# EAGLE board MainBoard (EAGLE 8.5.0)
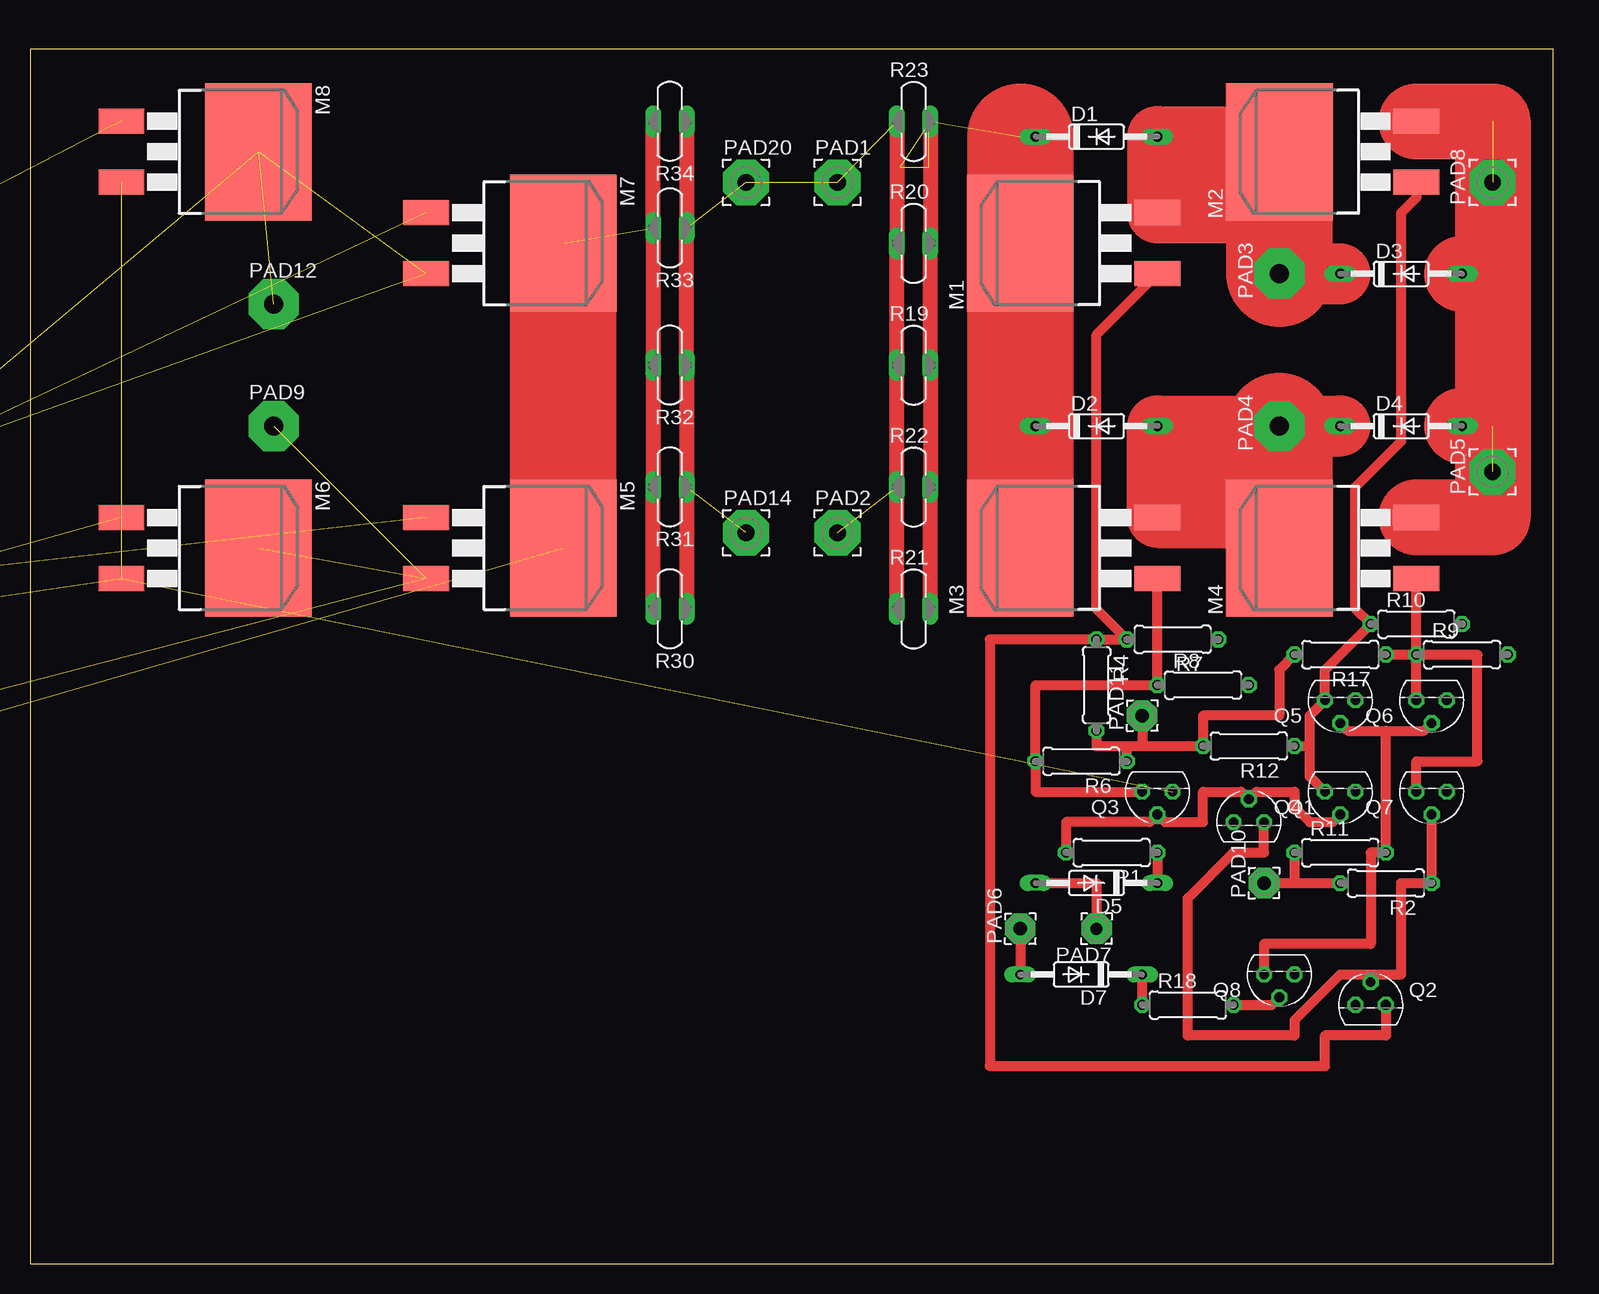
[diagram p0: board, top side]
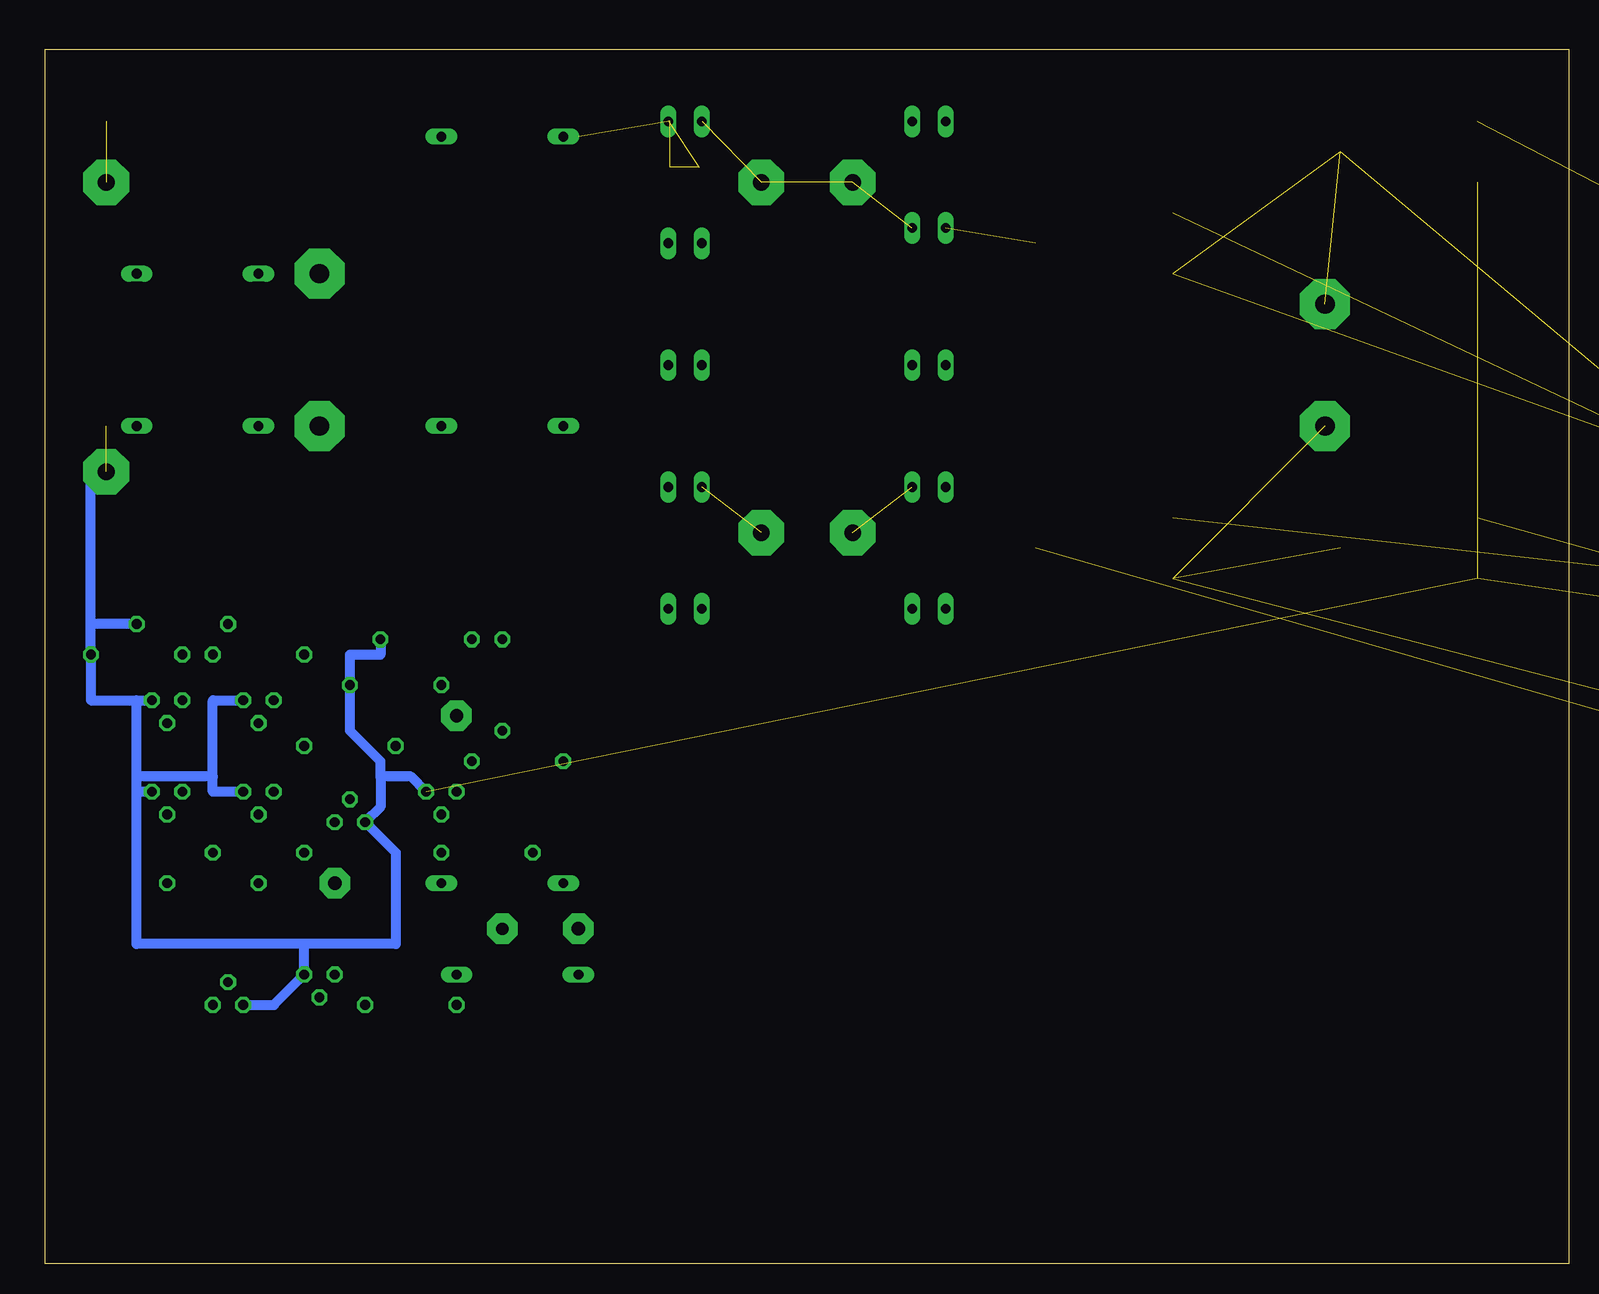
[diagram p1: board, bottom side, seen from below]

Size 126.98 x 101.27 mm. Coordinates in mm from the lower left corner, seen from the top.
Outline: 0,0 126.98,0 126.98,101.27 0,101.27 0,0
Copper layers (1*16): Top 0.035mm / dielectric 1.5mm / Bottom 0.035mm
Design rules "default": minimum track width 6mil, minimum drill 0.35mm, track to track 6mil, track to pad 6mil, pad to pad 6mil, via to via 6mil, smd to smd 6mil, copper to edge 40mil, drill to drill 6mil, minimum pad ring 10mil, minimum via ring 8mil, stop-mask expansion 4mil, vias tented up to drill 0mil, thermal gap 10mil

## Footprints (pad centres in the part's own frame; a part is rotated, then mirrored left to right if it is on the bottom)
DO35-10 = drill 0.813 long: A 5.08,0; C -5.08,0
D2PACK = smd 2.083 x 3.81: 1 -2.54,-8.89; 3 2.54,-8.89 | smd 11.43 x 8.89: 2 0,2.54
3,81/1,4 = drill 1.397 pad 3.81 octagon: 1 0,0
4,16O1,6 = drill 1.6 pad 4.166 octagon: 1 0,0
2,54/1,1 = drill 1.118 pad 2.54 octagon: 1 0,0
2,54/1,0 = drill 1.016 pad 2.54 octagon: 1 0,0
TO92 = drill 0.813 octagon: 1 1.27,0; 2 0,1.905; 3 -1.27,0
0207/7 = drill 0.813 octagon: 1 -3.81,0; 2 3.81,0
P660A = drill 0.813 long: 1 -1.397,0; 2 1.397,0

## Placement (x,y rotation side)
D1  1N4148DO35-10  [DO35-10]  88.9,93.98 0 top
D2  1N4148DO35-10  [DO35-10]  88.9,69.85 0 top
D3  1N4148DO35-10  [DO35-10]  114.3,82.55 0 top
D4  1N4148DO35-10  [DO35-10]  114.3,69.85 0 top
D5  1N4148DO35-10  [DO35-10]  88.9,31.75 180 top
D6  1N4148DO35-10  [DO35-10]  -88.9,26.67 0 top  (outside the outline)
D7  1N4148DO35-10  [DO35-10]  87.63,24.13 180 top
D8  1N4148DO35-10  [DO35-10]  -64.77,26.67 0 top  (outside the outline)
D9  1N4148DO35-10  [DO35-10]  -40.64,26.67 0 top  (outside the outline)
D10  1N4148DO35-10  [DO35-10]  -160.02,11.43 0 top  (outside the outline)
D11  1N4148DO35-10  [DO35-10]  -135.89,11.43 0 top  (outside the outline)
D12  1N4148DO35-10  [DO35-10]  -111.76,11.43 0 top  (outside the outline)
M1  IRFS7537PBF  [D2PACK]  85.09,85.09 90 top
M2  IRFS7537PBF  [D2PACK]  106.68,92.71 90 top
M3  IRFS7537PBF  [D2PACK]  85.09,59.69 90 top
M4  IRFS7537PBF  [D2PACK]  106.68,59.69 90 top
M5  IRFS7537PBF  [D2PACK]  41.91,59.69 270 top
M6  IRFS7537PBF  [D2PACK]  16.51,59.69 270 top
M7  IRFS7537PBF  [D2PACK]  41.91,85.09 270 top
M8  IRFS7537PBF  [D2PACK]  16.51,92.71 270 top
PAD1  [3,81/1,4]  67.31,90.17 0 top
PAD2  [3,81/1,4]  67.31,60.96 0 top
PAD3  WIREPAD4,16O1,6  [4,16O1,6]  104.14,82.55 90 top
PAD4  WIREPAD4,16O1,6  [4,16O1,6]  104.14,69.85 90 top
PAD5  [3,81/1,4]  121.92,66.04 90 top
PAD6  [2,54/1,1]  82.55,27.94 90 top
PAD7  [2,54/1,0]  88.9,27.94 180 top
PAD8  [3,81/1,4]  121.92,90.17 90 top
PAD9  WIREPAD4,16O1,6  [4,16O1,6]  20.32,69.85 0 top
PAD10  [2,54/1,1]  102.87,31.75 90 top
PAD11  [2,54/1,1]  92.71,45.72 90 top
PAD12  WIREPAD4,16O1,6  [4,16O1,6]  20.32,80.01 0 top
PAD13  [2,54/1,1]  -45.72,110.49 0 top  (outside the outline)
PAD14  [3,81/1,4]  59.69,60.96 0 top
PAD15  [2,54/1,0]  -160.02,72.39 0 top  (outside the outline)
PAD16  [2,54/1,1]  -134.62,72.39 0 top  (outside the outline)
PAD17  [2,54/1,1]  -109.22,72.39 0 top  (outside the outline)
PAD18  [3,81/1,4]  -153.67,104.14 0 top  (outside the outline)
PAD19  [3,81/1,4]  -115.57,104.14 0 top  (outside the outline)
PAD20  [3,81/1,4]  59.69,90.17 0 top
Q1  2N3904  [TO92]  101.6,36.83 0 top
Q2  2N3904  [TO92]  111.76,21.59 0 top
Q3  2N3904  [TO92]  93.98,39.37 180 top
Q4  2N3904  [TO92]  109.22,39.37 180 top
Q5  2N3904  [TO92]  109.22,46.99 180 top
Q6  2N3904  [TO92]  116.84,46.99 180 top
Q7  2N3904  [TO92]  116.84,39.37 180 top
Q8  2N3904  [TO92]  104.14,24.13 180 top
Q9  2N3904  [TO92]  -87.63,50.8 0 top  (outside the outline)
Q10  2N3904  [TO92]  -69.85,50.8 0 top  (outside the outline)
Q11  2N3904  [TO92]  -52.07,50.8 0 top  (outside the outline)
Q12  2N3904  [TO92]  -34.29,50.8 0 top  (outside the outline)
Q13  2N3904  [TO92]  -163.83,25.4 0 top  (outside the outline)
Q14  2N3904  [TO92]  -146.05,25.4 0 top  (outside the outline)
Q15  2N3904  [TO92]  -128.27,25.4 0 top  (outside the outline)
Q16  2N3904  [TO92]  -110.49,25.4 0 top  (outside the outline)
R1  [0207/7]  90.17,34.29 180 top
R2  [0207/7]  113.03,31.75 180 top
R3  [0207/7]  -88.9,11.43 0 top  (outside the outline)
R4  [0207/7]  88.9,48.26 270 top
R5  [0207/7]  -67.31,11.43 0 top  (outside the outline)
R6  [0207/7]  87.63,41.91 180 top
R7  [0207/7]  95.25,52.07 180 top
R8  [0207/7]  97.79,48.26 0 top
R9  [0207/7]  119.38,50.8 0 top
R10  [0207/7]  115.57,53.34 0 top
R11  [0207/7]  109.22,34.29 0 top
R12  [0207/7]  101.6,43.18 180 top
R13  [0207/7]  -45.72,11.43 0 top  (outside the outline)
R14  [0207/7]  -161.29,-2.54 0 top  (outside the outline)
R15  [0207/7]  -139.7,-2.54 0 top  (outside the outline)
R16  [0207/7]  -118.11,-2.54 0 top  (outside the outline)
R17  [0207/7]  109.22,50.8 180 top
R18  [0207/7]  96.52,21.59 0 top
R19  [P660A]  73.66,74.93 0 top
R20  [P660A]  73.66,85.09 0 top
R21  [P660A]  73.66,54.61 0 top
R22  [P660A]  73.66,64.77 0 top
R23  [P660A]  73.66,95.25 0 top
R24  [0207/7]  -96.52,-2.54 0 top  (outside the outline)
R25  [0207/7]  -74.93,-2.54 0 top  (outside the outline)
R26  [0207/7]  -53.34,-2.54 0 top  (outside the outline)
R27  [0207/7]  -31.75,-2.54 0 top  (outside the outline)
R28  [0207/7]  -161.29,-16.51 0 top  (outside the outline)
R29  [0207/7]  -139.7,-16.51 0 top  (outside the outline)
R30  [P660A]  53.34,54.61 180 top
R31  [P660A]  53.34,64.77 180 top
R32  [P660A]  53.34,74.93 180 top
R33  [P660A]  53.34,86.36 180 top
R34  [P660A]  53.34,95.25 180 top

## Library data of the parts
D1-D12 = diode
M1-M8 = EagleCAD
PAD1-PAD20 = wirepad
Q1-Q16 = transistor-npn
R1-R16 R18 R24-R27 R29 = rcl; SPICEPREFIX: R
R17 R28 = resistor
R19-R23 R30-R34 = ptc-ntc; OC_FARNELL: unknown; OC_NEWARK: unknown

## Nets
0: D3.A D4.A D9.A D10.A M2.3 M4.3 M6.3 M8.3 PAD5.1 PAD8.1 PAD18.1 PAD19.1 Q1.3 Q2.3 Q3.3 Q4.3 Q5.3 Q6.3 Q7.3 Q8.3 Q9.3 Q10.3 Q11.3 Q12.3 Q13.3 Q14.3 Q15.3 Q16.3 R7.1 R8.2 R9.2 R10.2 R15.1 R16.2 R24.2 R25.2
BB: Q1.2 Q3.2 Q4.2 R1.2
BB1: Q9.2 Q11.2 Q12.2 R3.2
BF: M3.1 Q3.1 R6.2 R8.1
BF1: M7.1 Q11.1 R14.2 R16.1
DIR: D5.A PAD7.1
DIR1: D11.A PAD15.1
FB: Q1.1 Q2.2 Q7.2 R2.1
FB1: Q9.1 Q10.2 Q15.2 R5.1
FF: M1.1 Q2.1 R4.1 R7.2
FF1: M5.1 Q10.1 R13.1 R15.2
MN: D2.A D4.C M3.3 M4.2 PAD4.1
MN1: D8.A D10.C M7.3 M8.2 PAD12.1
MP: D1.A D3.C M1.3 M2.2 PAD3.1
MP1: D6.A D9.C M5.3 M6.2 PAD9.1
N$2: D7.C R18.1
N$3: M6.1 Q12.1 Q13.1 R25.1 R27.1
N$4: D7.A PAD6.1
N$5: M8.1 Q14.1 Q15.1 R24.1 R28.1
N$6: Q13.2 Q14.2 Q16.1 R26.2
N$7: Q16.2 R29.2
N$8: D11.C R3.1
N$10: D12.C R29.1
N$11: D12.A PAD13.1
N$16: Q5.2 Q6.2 Q8.1 R11.2
N$19: D5.C R1.1
N$20: M2.1 Q4.1 Q5.1 R10.1 R12.1
N$23: Q8.2 R18.2
N$27: M4.1 Q6.1 Q7.1 R9.1 R17.1
VBAT: PAD1.1 PAD2.1 PAD14.1 PAD20.1 R19.1 R20.1 R21.1 R22.1 R23.1 R30.1 R31.1 R32.1 R33.1 R34.1
VDD: D1.C D2.C M1.2 M3.2 R19.2 R20.2 R21.2 R22.2 R23.2
VDD1: D6.C D8.C M5.2 M7.2 R30.2 R31.2 R32.2 R33.2 R34.2
VG: PAD11.1 R4.2 R6.1 R12.2 R17.2
VG1: PAD17.1 R13.2 R14.1 R27.2 R28.2
VSW: PAD10.1 R2.2 R11.1
VSW1: PAD16.1 R5.2 R26.1

## Tracks (layer width: path | path; a pad name or v marks a point on that pad's centre or on a via)
0  (20 unrouted)
  Top 6.35: 121.92,82.55 121.92,95.25 M2.3 | 121.92,82.55 121.92,69.85 | 121.92,69.85 121.92,62.23 M4.3 | D4.A 121.92,69.85 | D3.A 121.92,82.55
  Bottom 0.813: Q7.3 119.38,39.37 | 119.38,39.37 119.38,40.64 | 119.38,40.64 119.38,46.99 | 119.38,46.99 Q6.3 | R9.2 123.19,46.99 119.38,46.99 | 119.38,39.37 119.38,26.67 105.41,26.67 | R9.2 | R9.2 123.19,53.34 | 99.06,50.8 101.6,50.8 R8.2 101.6,44.45 99.06,41.91 99.06,40.64 | 99.06,50.8 | Q4.3 113.03,39.37 113.03,40.64 | 113.03,40.64 113.03,46.99 Q5.3 | 113.03,40.64 119.38,40.64 | 105.41,26.67 Q8.3 107.95,21.59 Q2.3 | Q3.3 96.52,40.64 99.06,40.64 | 99.06,40.64 99.06,38.1 Q1.3 97.79,34.29 97.79,26.67 105.41,26.67 | R7.1 | R7.1 99.06,50.8 | R10.2 123.19,53.34 | 123.19,53.34 123.19,66.04 PAD5.1
BB
  Top 0.813: Q4.2 108.58,36.83 106.68,36.83 105.41,38.1 105.41,39.37 102.23,39.37 Q1.2 100.97,39.37 97.79,39.37 97.79,36.83 94.61,36.83 Q3.2 93.34,36.83 86.36,36.83 R1.2
BB1  (3 unrouted)
BF
  Top 0.813: M3.1 R8.1 83.82,48.26 R6.2 83.82,39.37 Q3.1
BF1  (3 unrouted)
DIR
  Top 0.813: D5.A 88.9,31.75 PAD7.1
DIR1  (1 unrouted)
FB
  Top 0.813: Q7.2 R2.1 114.3,31.75 114.3,24.13 111.76,24.13 | Q1.1 102.87,34.29 100.33,34.29 96.52,30.48 96.52,19.05 105.41,19.05 105.41,20.32 109.22,24.13 111.76,24.13 | Q2.2 111.76,24.13
FB1  (3 unrouted)
FF
  Top 0.813: M1.1 88.9,77.47 88.9,54.61 R7.2 | R7.2 | R7.2 R4.1 80.01,52.07 80.01,16.51 107.95,16.51 107.95,19.05 113.03,19.05 Q2.1
FF1  (3 unrouted)
MN
  Top 5.08: PAD4.1 D2.A 93.98,66.04 | M4.2 101.6,62.23 M3.3 93.98,66.04 | PAD4.1 D4.C | 93.98,66.04 102.87,66.04 104.14,67.31 PAD4.1
  Top 8.89: M4.2 PAD4.1
MN1  (4 unrouted)
MP
  Top 5.08: M2.2 104.14,95.25 102.87,93.98 D1.A M1.3 | M1.3 104.14,87.63 | D3.C PAD3.1 104.14,88.9 102.87,90.17 96.52,90.17 M1.3
  Top 8.89: PAD3.1 104.14,87.63 M2.2
MP1  (4 unrouted)
N$2
  Top 0.813: R18.1 D7.C
N$3  (4 unrouted)
N$4
  Top 0.813: PAD6.1 D7.A
N$5  (4 unrouted)
N$6  (3 unrouted)
N$7  (1 unrouted)
N$8  (1 unrouted)
N$10  (1 unrouted)
N$11  (1 unrouted)
N$16
  Top 0.813: Q5.2 109.86,44.45 113.03,44.45 | Q6.2 116.2,44.45 113.03,44.45 | 113.03,44.45 R11.2 111.76,34.29 111.76,26.67 102.87,26.67 Q8.1
N$19
  Top 0.813: R1.1 D5.C
N$20
  Top 0.813: Q4.1 106.68,40.64 106.68,43.18 | 106.68,43.18 106.68,45.72 Q5.1 107.95,49.53 R10.1 110.49,54.61 110.49,64.77 114.3,68.58 114.3,87.63 115.57,88.9 M2.1 | R12.1 106.68,43.18
N$23
  Top 0.813: Q8.2 103.5,21.59 R18.2
N$27
  Top 0.813: Q6.1 R9.1 | R9.1 M4.1 | Q7.1 115.57,41.91 120.65,41.91 120.65,50.8 R9.1 | R17.1 R9.1
VBAT  (5 unrouted)
  Top 1.27: R21.1 R22.1 R19.1 R20.1 R23.1 | R34.1 R33.1 R32.1 R31.1 R30.1
VDD  (5 unrouted)
  Top 1.27: R23.2 R20.2 R19.2 R22.2 R21.2
  Top 2.54: 83.82,74.93 D2.C
  Top 5.08: D2.C 82.55,68.58 M3.2 | D1.C 83.82,85.09 M1.2
  Top 8.89: M3.2 M1.2 82.55,93.98
VDD1  (3 unrouted)
  Top 1.27: R30.2 R31.2 R32.2 R33.2 R34.2
  Top 8.89: M5.2 M7.2
VG
  Top 0.813: R6.1 91.44,43.18 | 91.44,43.18 92.71,43.18 | 92.71,43.18 R12.2 97.79,45.72 104.14,45.72 104.14,49.53 R17.2 | R4.2 88.9,43.18 91.44,43.18 | PAD11.1 92.71,43.18
VG1  (4 unrouted)
VSW
  Top 0.813: R11.1 105.41,31.75 | 105.41,31.75 R2.2 | PAD10.1 105.41,31.75
VSW1  (2 unrouted)